# Altium PCB PCB_Alpha.PcbDoc (part 2 of 2)
Units mm, origin at the board's own origin, x right, y up, seen from the top; angles counter-clockwise.
Board outline 114.3 x 137.16 mm, 2 copper layers (Top Layer, Bottom Layer); 181 components, 118 nets, 600 pads, 750 vias.
Unrouted connection lines stored in the file: 4.
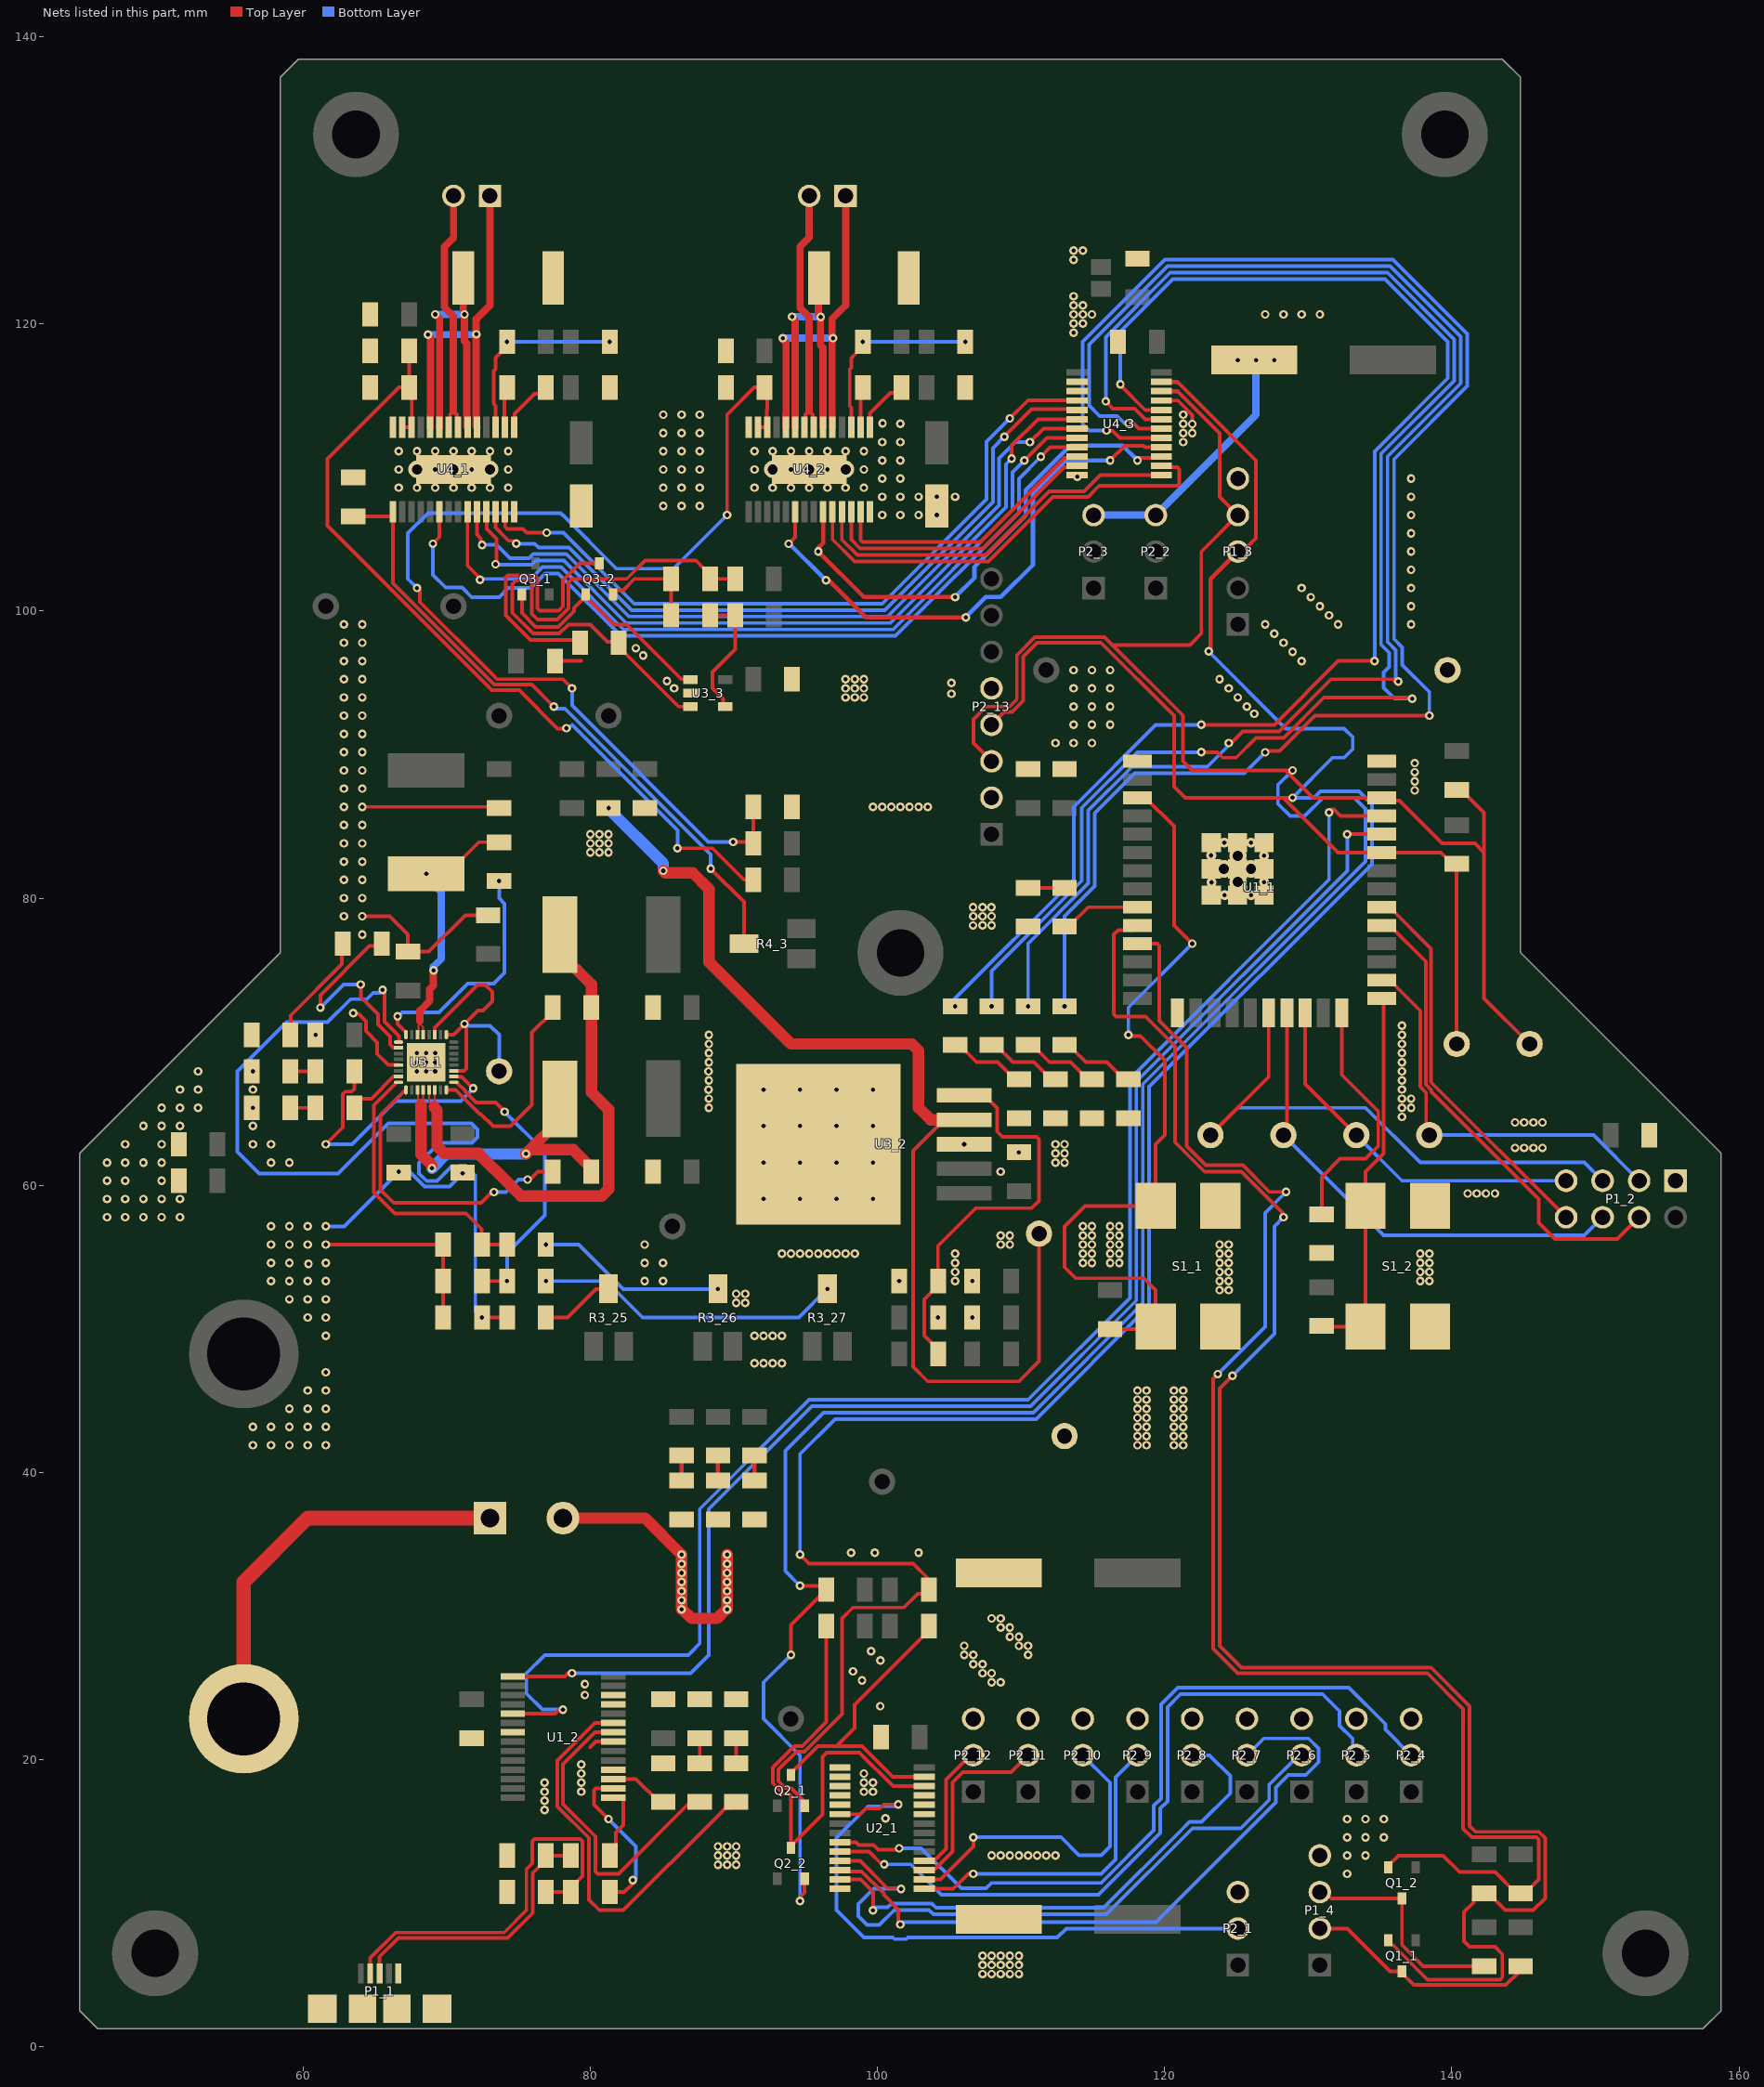
[diagram p2: the nets of this part, all layers, seen from the top]

## Via types
v1: diameter 0.6, hole 0.3, Top Layer to Bottom Layer, 732 vias
v2: diameter 1.2, hole 0.7, Top Layer to Bottom Layer, 10 vias
v3: diameter 0.7, hole 0.3, Top Layer to Bottom Layer, 8 vias

## Nets (pads, with @x,y where several pads share a name; then routed paths per layer and width w, separated by ;. In a path a pad name is that pad's centre, name@x,y a point inside that pad or via, vN(x,y) a via of type N, cw(c..) or ccw(c..) an arc to the next point about the centre after c; other vN are vias at no path point) (continued)
GND: C1_1.2 C1_2.2 C1_3.2 C1_4.2 C1_5.2 C1_6.1 C1_7.2 C1_8.2 C2_1.2 C2_2.2 C2_3.2 C2_4.2 C3_1.1 C3_2.1 C3_3.1 C3_10.1 C3_11.1 C3_12.1 C3_13.1 C3_14.1 C3_15.1 C3_16.1 C3_17.1 C3_18.1 C3_19.1 C4_5.2 C4_7.2 C4_8.2 C4_9.2 C4_10.2 C4_11.2 C4_12.2 C4_13.2 C4_14.2 C4_15.2 D3_1.1 D3_3.1 P1_1.5 P1_1.6 P1_2.1 P1_3.5 P1_4.4 P2_1.3 P2_2.3 P2_3.3 P2_4.3 P2_5.3 P2_6.3 P2_7.3 P2_8.3 P2_9.3 P2_10.3 P2_11.3 P2_12.3 P2_13.2 P2_13.5 P3_1.2 Q3_2.2 R1_1.2 R1_6.2 R1_7.2 R1_14.2 R3_1.2 R3_2.2 R3_3.1 R3_7.1 R3_8.1 R3_9.2 R3_11.1 R3_14.1 R3_18.1 R3_20.2 R3_21.2 R3_22.2 R3_23.2 R3_24.2 R4_2.2 R4_6.2 R4_7.2 R4_8.2 R4_9.2 R4_10.2 R4_11.2 R4_13.2 R4_15.2 S1_1.1 S1_2.2 T3_7.1 T3_8.1 T3_9.1 U1_1.1 U1_1.15 U1_1.38 U1_1.39 U1_1.40 U1_1.41 U1_1.42 U1_1.43 U1_1.44 U1_1.45 U1_1.46 U1_1.47 U1_2.7 U1_2.18 U1_2.21 U1_2.25 U1_2.26 U2_1.1 U2_1.2 U2_1.3 U2_1.4 U2_1.5 U2_1.14 U2_1.23 U2_1.24 U2_1.25 U3_1.5 U3_1.19 U3_1.25 U3_1.27 U3_1.33 U3_2.3 U3_3.2 U4_1.14 U4_1.28 U4_2.14 U4_2.28 U4_3.2 U4_3.3 U4_3.12 U4_3.21 | length 127.1
  Top Layer w0.254: v1(61.595,55.88) R3_7.1@69.77,55.88 R3_8.1@69.77,53.34 R3_9.2@69.77,50.8 ; v1(63.5,72.009) 63.566,71.943 63.881,71.943 64.263,71.561 64.384,71.44 64.384,70.749 65.174,69.959 65.174,69.157 65.949,68.382 66.653,68.382 U3_1.5@66.655,68.38 ; v1(64.135,78.74) 66.04,78.74 67.31,77.47 C3_10.1@67.31,76.28 68.762,76.28 71.302,78.82 C3_11.1@72.898,78.82 ; v1(64.135,86.36) 73.58,86.36 C3_3.1@73.66,86.28 ; U3_1.33@69.137,68.023 v1(68.58,68.58) U3_1.33@69.18,69.18 ; U3_1.27@69.18,70.505 69.182,70.507 69.182,70.993 72.159,73.969 72.716,73.969 73.195,73.49 73.195,72.828 72.547,72.18 72.18,72.18 v1(71.247,71.247) ; U3_1.25@70.033,70.505 70.505,70.505 v1(71.247,71.247) ; U3_1.19@70.505,67.98 70.507,67.982 71.225,67.982 71.374,68.131 71.374,71.026 71.247,71.153 v1(71.247,71.247) ; R3_18.1@77.55,96.52 79.375,96.52 ; 80.01,20.879 80.396,21.265 U1_2.21@81.605,21.265 ; Q3_2.2@81.595,101.16 81.595,101.285 81.768,101.458 82.312,101.458 83.089,102.235 R3_14.1@85.645,102.235 D3_1.1@85.645,99.695 ; U4_3.12@113.449,109.357 113.547,109.455 U4_3.12@113.722,109.455 ; U4_3.12@113.902,109.378 113.919,109.361 v1(113.919,109.347) ; U4_3.21@119.778,114.655 120.91,114.655 121.92,113.645 v1(121.92,112.395)
  Top Layer w0.508: R3_24.2@86.32,36.79 R3_24.2@86.36,36.75
  Top Layer w0.762: R3_23.2@91.4,36.79 R3_23.2@91.44,36.75
  Top Layer w0.8: P3_1.2@78.105,36.83 83.82,36.83 v1(86.36,34.29) v1(86.36,32.385) v1(86.36,30.48) 86.425,30.48 87.06,29.845 88.835,29.845 89.47,30.48 v1(89.535,30.48) v1(89.535,32.385) v1(89.535,34.29)
  Bottom Layer w0.254: v1(61.595,57.15) 62.865,57.15 v1(66.675,60.96) 67.419,60.96 68.455,59.924 70.211,59.924 v1(71.12,60.833) ; v1(71.247,71.247) 71.374,71.12 73.025,71.12 73.66,70.485 T3_8.1@73.66,67.945
  Bottom Layer w0.508: T3_8.1@73.646,67.296 T3_8.1@73.646,67.303 ; P2_3.3@115.062,106.68 P2_2.3@119.38,106.68 126.365,113.665 v1(126.365,117.475)
  other v1: 107.315,5.08 107.95,5.08 108.585,5.08 109.22,5.08 109.855,5.08 107.315,5.715 107.95,5.715 108.585,5.715 109.22,5.715 109.855,5.715 107.315,6.35 107.95,6.35 108.585,6.35 109.22,6.35 109.855,6.35 132.715,12.065 88.9,12.7 89.535,12.7 90.17,12.7 88.9,13.335 89.535,13.335 90.17,13.335 107.95,13.335 108.585,13.335 109.22,13.335 109.855,13.335 110.49,13.335 111.125,13.335 111.76,13.335 112.395,13.335 132.715,13.335 133.985,13.335 88.9,13.97 89.535,13.97 90.17,13.97 132.715,14.605 133.985,14.605 135.255,14.605 132.715,15.875 133.985,15.875 135.255,15.875 100.559,15.926 76.835,16.51 76.835,17.145 76.835,17.78 79.375,17.78 99.06,17.78 99.695,17.78 76.835,18.415 79.375,18.415 99.06,18.415 99.695,18.415 79.375,19.05 99.06,19.05 79.375,19.685 100.197,23.733 79.629,24.511 79.629,25.273 107.95,25.4 108.585,25.4 98.933,25.527 107.315,26.035 107.95,26.035 98.298,26.162 106.68,26.67 107.315,26.67 100.203,26.924 106.045,27.305 106.68,27.305 110.49,27.305 99.568,27.559 106.045,27.94 109.855,27.94 110.49,27.94 109.22,28.575 109.855,28.575 108.585,29.21 109.22,29.21 107.95,29.845 108.585,29.845 86.36,31.115 89.535,31.115 86.36,31.75 89.535,31.75 86.36,33.02 89.535,33.02 86.36,33.655 89.535,33.655 98.171,34.417 99.822,34.417 102.87,34.417 56.515,41.91 57.785,41.91 59.055,41.91 60.325,41.91 61.595,41.91 118.11,41.91 118.745,41.91 120.65,41.91 121.285,41.91 118.11,42.545 118.745,42.545 120.65,42.545 121.285,42.545 56.515,43.18 57.785,43.18 59.055,43.18 60.325,43.18 61.595,43.18 118.11,43.18 118.745,43.18 120.65,43.18 121.285,43.18 118.11,43.815 118.745,43.815 120.65,43.815 121.285,43.815 59.055,44.45 60.325,44.45 61.595,44.45 118.11,44.45 118.745,44.45 120.65,44.45 121.285,44.45 118.11,45.085 118.745,45.085 120.65,45.085 121.285,45.085 60.325,45.72 61.595,45.72 118.11,45.72 118.745,45.72 120.65,45.72 121.285,45.72 61.595,46.99 91.44,47.625 92.075,47.625 92.71,47.625 93.345,47.625 61.595,49.53 91.44,49.53 92.075,49.53 92.71,49.53 93.345,49.53 60.325,50.8 61.595,50.8 104.22,50.8 106.6,50.8 90.17,51.816 90.805,51.816 59.055,52.07 60.325,52.07 61.595,52.07 90.17,52.451 90.805,52.451 123.825,52.705 124.46,52.705 57.785,53.34 59.055,53.34 60.325,53.34 61.595,53.34 83.8,53.338 85.07,53.338 101.52,53.34 105.41,53.34 106.6,53.34 123.825,53.34 124.46,53.34 137.795,53.34 138.43,53.34 105.41,53.975 123.825,53.975 124.46,53.975 137.795,53.975 138.43,53.975 60.388,54.541 57.785,54.61 59.055,54.61 61.595,54.61 83.8,54.608 85.07,54.608 105.41,54.61 114.3,54.61 114.935,54.61 116.205,54.61 116.84,54.61 123.825,54.61 124.46,54.61 137.795,54.61 138.43,54.61 93.345,55.245 93.98,55.245 94.615,55.245 95.25,55.245 95.885,55.245 96.52,55.245 97.155,55.245 97.79,55.245 98.425,55.245 105.41,55.245 114.3,55.245 114.935,55.245 116.205,55.245 116.84,55.245 123.825,55.245 124.46,55.245 137.795,55.245 138.43,55.245 57.785,55.88 59.055,55.88 60.325,55.88 83.8,55.878 108.585,55.88 109.22,55.88 114.3,55.88 114.935,55.88 116.205,55.88 116.84,55.88 123.825,55.88 124.46,55.88 108.585,56.515 109.22,56.515 114.3,56.515 114.935,56.515 116.205,56.515 116.84,56.515 57.785,57.15 59.055,57.15 60.325,57.15 114.3,57.15 114.935,57.15 116.205,57.15 116.84,57.15 46.355,57.785 47.625,57.785 48.895,57.785 50.165,57.785 51.435,57.785 46.355,59.055 47.625,59.055 48.895,59.055 50.165,59.055 51.435,59.055 92.075,59.055 94.615,59.055 97.155,59.055 99.695,59.055 141.097,59.436 141.732,59.436 142.367,59.436 143.002,59.436 46.355,60.325 47.625,60.325 50.165,60.325 108.585,60.96 46.355,61.595 47.625,61.595 48.895,61.595 50.165,61.595 57.785,61.595 59.055,61.595 92.075,61.595 94.615,61.595 97.155,61.595 99.695,61.595 112.395,61.595 113.03,61.595 112.395,62.23 113.03,62.23 109.855,62.31 144.399,62.611 145.034,62.611 145.669,62.611 146.304,62.611 47.625,62.865 50.165,62.865 56.515,62.865 57.785,62.865 106.045,62.865 112.395,62.865 113.03,62.865 48.895,64.135 50.165,64.135 51.435,64.135 56.515,64.135 92.075,64.135 94.615,64.135 97.155,64.135 99.695,64.135 144.399,64.389 145.034,64.389 145.669,64.389 146.304,64.389 136.525,64.77 50.165,65.405 51.435,65.405 52.705,65.405 56.515,65.405 88.265,65.405 136.525,65.405 137.16,65.405 88.265,66.04 136.525,66.04 137.16,66.04 51.435,66.675 52.705,66.675 56.515,66.675 88.245,66.673 92.075,66.675 94.615,66.675 97.155,66.675 99.695,66.675 136.525,66.675 88.265,67.31 136.525,67.31 52.705,67.945 56.515,67.945 67.945,67.945 68.58,67.945 69.215,67.945 88.245,67.943 136.525,67.945 67.945,68.58 69.215,68.58 88.265,68.58 136.525,68.58 67.945,69.215 68.58,69.215 69.215,69.215 88.265,69.215 136.525,69.215 88.265,69.85 136.525,69.85 60.88,70.485 88.265,70.485 136.525,70.485 136.525,71.12 64.135,77.47 106.66,78.103 107.315,78.105 107.95,78.105 62.865,78.74 106.68,78.74 107.315,78.74 107.95,78.74 106.66,79.373 107.315,79.375 107.93,79.373 62.865,80.01 64.135,80.01 62.865,81.28 64.135,81.28 62.865,82.55 64.135,82.55 80.01,83.185 80.645,83.185 81.28,83.185 62.865,83.82 64.135,83.82 80.01,83.82 80.645,83.82 81.28,83.82 80.01,84.455 80.645,84.455 81.28,84.455 62.865,85.09 64.135,85.09 62.865,86.36 99.695,86.36 100.33,86.36 100.965,86.36 101.6,86.36 102.235,86.36 102.87,86.36 103.505,86.36 137.414,87.503 62.865,87.63 64.135,87.63 137.414,88.138 137.414,88.773 62.865,88.9 64.135,88.9 137.414,89.408 62.865,90.17 64.135,90.17 112.395,90.805 113.665,90.805 114.935,90.805 62.865,91.44 64.135,91.44 113.665,92.075 114.935,92.075 116.205,92.075 62.865,92.71 64.135,92.71 126.236,92.839 113.665,93.345 114.935,93.345 116.205,93.345 125.73,93.345 62.865,93.98 64.135,93.98 97.79,93.98 98.425,93.98 99.06,93.98 125.095,93.98 105.156,94.234 85.852,94.615 97.79,94.615 98.425,94.615 99.06,94.615 113.665,94.615 114.935,94.615 116.205,94.615 124.46,94.615 105.156,94.996 85.344,95.123 62.865,95.25 64.135,95.25 97.79,95.25 98.425,95.25 99.06,95.25 123.825,95.25 113.665,95.885 114.935,95.885 116.205,95.885 62.865,96.52 64.135,96.52 129.54,96.52 83.693,96.901 128.905,97.155 83.185,97.409 62.865,97.79 64.135,97.79 128.27,97.79 127.635,98.425 62.865,99.06 64.135,99.06 127,99.06 132.08,99.06 137.16,99.06 131.445,99.695 130.81,100.33 137.16,100.33 130.175,100.965 129.54,101.6 137.16,101.6 137.16,102.87 137.16,104.14 137.16,105.41 100.33,106.68 101.6,106.68 102.87,106.68 104.14,106.68 137.16,106.68 85.09,107.315 86.36,107.315 87.63,107.315 100.33,107.95 101.6,107.95 102.87,107.95 104.14,107.95 105.41,107.95 137.16,107.95 66.675,108.585 67.945,108.585 69.215,108.585 70.485,108.585 71.755,108.585 73.025,108.585 74.295,108.585 85.09,108.585 86.36,108.585 87.63,108.585 91.44,108.585 92.71,108.585 93.98,108.585 95.25,108.585 96.52,108.585 97.79,108.585 99.06,108.585 100.33,109.22 101.6,109.22 137.16,109.22 66.675,109.855 69.215,109.855 71.755,109.855 74.295,109.855 85.09,109.855 86.36,109.855 87.63,109.855 91.44,109.855 93.98,109.855 96.52,109.855 99.06,109.855 100.33,110.49 101.6,110.49 66.675,111.125 67.945,111.125 69.215,111.125 70.485,111.125 71.755,111.125 73.025,111.125 74.295,111.125 85.09,111.125 86.36,111.125 87.63,111.125 91.44,111.125 92.71,111.125 93.98,111.125 95.25,111.125 96.52,111.125 97.79,111.125 99.06,111.125 100.33,111.76 101.6,111.76 121.285,111.76 85.09,112.395 86.36,112.395 87.63,112.395 121.285,112.395 101.6,113.03 121.285,113.03 121.92,113.02 100.358,113.069 85.09,113.665 86.36,113.665 87.63,113.665 121.285,113.665 125.095,117.475 127.635,117.475 113.665,119.38 113.665,120.015 114.3,120.015 113.665,120.65 114.3,120.65 114.935,120.65 127,120.65 128.27,120.65 129.54,120.65 130.81,120.65 113.665,121.285 114.3,121.285 113.665,121.92 113.665,124.46 113.665,125.095 114.3,125.095
  other v2: 125.095,81.128 124.13,82.042 126.009,82.042 125.095,82.956 67.945,109.855 70.485,109.855 73.025,109.855 92.71,109.855 95.25,109.855 97.79,109.855
  other v3: 124.181,80.213 126.009,80.213 123.266,81.102 126.924,81.128 126.924,82.956 123.241,82.982 124.155,83.871 126.009,83.871
LedProgRx: D1_1.2 U1_2.22 | length 22.2
  Top Layer w0.254: U1_2.22@81.605,21.915 80.335,21.915 78.105,19.685 78.105,16.924 80.366,14.664 80.366,12.214 80.514,12.065 81.981,12.065 86.981,17.065 D1_1.2@87.63,17.065
LedProgTx: D1_2.2 U1_2.23 | length 29.2
  Top Layer w0.254: U1_2.23@81.605,22.565 80.347,22.565 77.724,19.942 77.724,16.757 79.915,14.566 79.915,10.255 80.645,9.525 82.315,9.525 88.9,16.11 89.432,16.642 89.747,16.642 D1_2.2@90.17,17.065
NetC1_1_1: C1_1.1 U1_2.17 | length 4.1
  Top Layer w0.254: U1_2.17@81.605,18.665 83.19,18.665 84.79,17.065 C1_1.1@85.09,17.065
NetC1_6_2: C1_6.2 P1_1.2 R1_10.2 | length 27.4
  Top Layer w0.254: P1_1.2@64.692,5.117 64.692,6.194 66.469,7.971 74.011,7.971 75.565,9.525 75.565,12.382 75.971,12.787 75.971,14.329 76.12,14.478 79.315,14.478 79.464,14.329 79.464,11.899 78.448,10.883 78.448,10.795 C1_6.2@76.915,10.795
NetC1_7_1: C1_7.1 P1_1.3 R1_11.2 | length 19.2
  Top Layer w0.254: P1_1.3@65.342,5.117 65.342,6.287 66.645,7.59 73.633,7.59 74.268,7.59 76.016,9.338 76.016,9.973 76.016,12.136 76.915,13.035 C1_7.1@76.915,13.335 R1_11.2@78.66,13.335
NetC3_4_1: C3_4.1 U3_1.7 | length 4.1
  Top Layer w0.254: C3_4.1@63.58,65.405 63.58,65.617 64.003,66.04 64.768,66.04 66.306,67.578 66.653,67.578 U3_1.7@66.655,67.58
NetC3_4_2: C3_4.2 R3_1.1 | length 1.7
  Top Layer w0.254: R3_1.1@59.135,65.405 C3_4.2@60.88,65.405
NetC3_5_1: C3_5.1 U3_1.18 | length 19.4
  Top Layer w0.254: v1(61.595,62.865) 62.776,64.046 62.776,64.904 62.776,66.36 62.953,66.537 63.403,66.537 63.58,66.714 C3_5.1@63.58,67.945 ; 70.843,67.559 71.05,67.559 v1(71.856,66.754)
  Bottom Layer w0.254: v1(61.595,62.865) 63.417,62.865 66.433,65.881 70.983,65.881 71.755,66.653 v1(71.856,66.754)
NetC3_5_2: C3_5.2 R3_2.1 | length 1.7
  Top Layer w0.254: R3_2.1@59.135,67.945 C3_5.2@60.88,67.945
NetC3_6_1: C3_6.1 R3_3.2 | length 8
  Top Layer w0.254: R3_3.2@59.135,70.485 59.141,70.491 59.141,71.841 62.717,75.417 62.717,76.869 C3_6.1@62.843,76.995
NetC3_6_2: C3_6.2 U3_1.2 | length 15.8
  Top Layer w0.254: v1(61.217,72.378) 61.217,73.253 64.625,76.661 65.311,76.661 C3_6.2@65.485,76.835 ; v1(64.027,73.988) 64.039,73.976 64.039,73.121 65.232,71.928 65.232,71.202 66.076,70.358 66.076,69.812 66.306,69.582 66.457,69.582 66.459,69.58 U3_1.2@66.655,69.58
  Bottom Layer w0.254: v1(61.217,72.378) 62.827,73.988 v1(64.027,73.988)
NetC3_7_1: C3_7.1 U3_1.9 | length 21
  Top Layer w0.254: U3_1.9@67.18,66.655 67.18,66.668 67.178,66.67 65.405,64.897 65.405,59.69 66.318,58.777 72.402,58.777 73.162,59.537 v1(73.303,59.537) ; v1(75.648,60.408) 75.815,60.408 76.367,60.96 C3_7.1@77.39,60.96
  Bottom Layer w0.254: v1(73.303,59.537) 74.142,59.537 75.013,60.408 v1(75.648,60.408)
NetC3_7_2: C3_7.2 L3_1.1 U3_1.11 U3_1.12 | length 23.9
  Top Layer w0.127: U3_1.11@67.98,66.655 68.024,66.611 68.024,65.961 68.199,65.786 68.38,65.967 U3_1.12@68.38,66.655
  Top Layer w0.254: C3_7.2@79.899,61.151 C3_7.2@80.09,60.96
  Top Layer w0.508: 68.215,65.786 68.221,65.78 ; v1(68.981,61.194) v1@68.981,61.4 ; v1(75.533,62.198) 75.565,62.23 v1@75.565,62.238 ; L3_1.1@77.893,64.566 L3_1.1@77.893,66.026
  Top Layer w0.8: 68.229,65.61 68.217,65.598 68.217,65.311 68.221,65.306 68.221,62.16 68.58,61.801 v1@68.981,61.4 ; v1(75.533,62.198) 75.819,62.484 78.82,62.484 79.894,61.41 79.94,61.41 C3_7.2@79.94,61.151 ; v1@75.565,62.238 L3_1.1@77.893,64.566
  Bottom Layer w0.8: v1(68.981,61.194) 69.97,62.183 75.518,62.183 v1(75.533,62.198)
NetC3_8_1: C3_8.1 U3_1.16 | length 15
  Top Layer w0.254: U3_1.16@69.98,66.655 70.632,66.655 72.317,64.97 72.39,64.97 73.246,64.114 74.459,64.114 75.946,65.601 75.946,70.646 77.39,72.09 C3_8.1@77.39,72.39
NetC3_8_2: C3_8.2 L3_2.1 U3_1.13 U3_1.14 | length 37.7
  Top Layer w0.127: U3_1.13@68.78,66.655 68.78,65.84 68.908,65.712 69.014,65.712 69.18,65.878 U3_1.14@69.18,66.655
  Top Layer w0.508: 74.446,59.994 74.446,60.011 ; L3_2.1@77.893,77.456 77.893,75.996 78.845,75.043 L3_2.1@79.049,75.043
  Top Layer w0.8: 69.144,65.461 69.144,65.435 69.342,65.237 69.342,62.738 69.85,62.23 72.227,62.23 74.446,60.011 ; 74.446,59.994 75.175,59.265 80.811,59.265 81.28,59.734 81.28,65.297 80.09,66.487 C3_8.2@80.09,72.39 80.09,74.002 L3_2.1@79.049,75.043
NetC3_9_1: C3_9.1 L3_3.2 U3_1.29 U3_1.30 | length 19.1
  Top Layer w0.127: U3_1.30@67.98,70.505 68.042,70.567 68.042,71.115 68.12,71.194 68.12,71.235 ; 68.166,71.281 68.166,71.232 68.38,71.018 U3_1.29@68.38,70.505
  Top Layer w0.254: 68.153,71.268 68.153,71.455 ; v1(68.594,81.703) 70.054,81.703 72.252,83.9 C3_9.1@73.66,83.9
  Top Layer w0.508: 68.153,71.455 68.153,72.172 68.834,72.852 68.834,73.66 69.093,73.919 v1(69.093,74.974)
  Bottom Layer w0.508: v1(68.594,81.703) 68.594,81.472 69.639,80.427 69.639,75.783 69.093,75.237 v1(69.093,74.974)
NetC3_9_2: C3_9.2 U3_1.32 | length 16.6
  Top Layer w0.254: v1(66.594,71.783) 66.599,71.778 66.599,71.247 67.143,70.703 U3_1.32@67.178,70.703
  Bottom Layer w0.254: v1(66.594,71.783) 66.654,71.783 66.916,72.045 69.479,72.045 71.476,74.041 73.279,74.041 74.041,74.803 74.041,79.629 73.66,80.01 v1(73.66,81.2)
NetC4_1_1: C4_1.1 U4_1.1 | length 3.9
  Top Layer w0.254: U4_1.1@74.71,112.793 74.754,112.837 74.754,113.743 76.133,115.122 76.492,115.122 76.915,115.545 C4_1.1@76.915,115.57
NetC4_1_2: C4_1.2 U4_1.2 | length 2.9
  Top Layer w0.254: U4_1.2@74.06,112.793 74.04,112.813 74.04,115.395 C4_1.2@74.215,115.57
NetC4_2_1: C4_2.1 U4_2.1 | length 3.9
  Top Layer w0.254: U4_2.1@99.475,112.793 99.475,113.775 100.898,115.198 101.308,115.198 C4_2.1@101.68,115.57
NetC4_2_2: C4_2.2 U4_2.2 | length 2.8
  Top Layer w0.254: U4_2.2@98.825,112.793 98.824,115.414 C4_2.2@98.98,115.57
NetC4_3_2: C4_3.2 R4_4.1 U4_1.3 | length 13.5
  Top Layer w0.254: U4_1.3@73.41,112.793 73.41,114.296 73.279,114.427 73.279,116.713 73.406,116.84 73.406,117.636 74.215,118.445 v1(74.215,118.745)
  Bottom Layer w0.254: v1(74.215,118.745) v1(81.36,118.745)
NetC4_4_2: C4_4.2 R4_5.1 U4_2.3 | length 13.5
  Top Layer w0.254: U4_2.3@98.175,112.793 98.175,114.169 98.075,114.269 98.075,116.84 98.175,116.94 98.175,117.606 98.557,117.988 98.557,118.322 v1(98.98,118.745)
  Bottom Layer w0.254: v1(98.98,118.745) v1(106.125,118.745)
NetC4_5_1: C4_5.1 R4_3.3 U4_1.15 | length 44.9
  Top Layer w0.254: C4_5.1@63.5,106.6 66.162,106.6 U4_1.15@66.26,106.698 ; U4_1.15@66.26,106.917 U4_1.15@66.26,106.698 ; v1(77.47,93.345) 75.946,94.869 73.32,94.869 66.26,101.929 66.26,106.6 U4_1.15@66.26,106.698 ; v1(88.393,82.054) 90.71,79.738 R4_3.3@90.71,76.835
  Bottom Layer w0.254: v1(77.47,93.345) 77.617,93.198 78.252,93.198 88.393,83.057 v1(88.393,82.054)
NetC4_14_1: C4_14.1 R4_1.1 R4_2.1 U4_1.12 U4_1.13 | length 59.3
  Top Layer w0.254: U4_1.13@66.91,112.793 U4_1.12@67.56,112.793 67.579,112.812 67.579,115.381 C4_14.1@67.39,115.57 ; R4_2.1@67.39,118.11 C4_14.1@67.39,115.57 ; v1(78.349,91.844) 78.326,91.821 77.724,91.821 75.057,94.488 73.152,94.488 61.7,105.94 61.7,110.595 66.675,115.57 C4_14.1@67.39,115.57 ; v1(86.082,83.483) 88.516,83.483 90.719,81.28 R4_1.1@91.36,81.28
  Bottom Layer w0.254: v1(78.349,91.844) 78.359,91.854 78.519,91.854 78.74,92.075 86.082,84.733 v1(86.082,83.483)
NetC4_15_1: C4_15.1 R4_14.1 R4_15.1 U4_2.12 U4_2.13 | length 78.4
  Top Layer w0.254: v1(67.945,101.6) 68.139,101.406 68.139,100.623 73.115,95.647 73.512,95.25 78.105,95.25 v1(78.74,94.615) ; v1(89.535,106.68) 89.535,113.665 91.44,115.57 C4_15.1@92.155,115.57 92.325,115.4 92.325,114.05 92.311,114.036 92.311,112.807 U4_2.12@92.325,112.793 U4_2.13@91.675,112.793 ; v1(89.961,83.919) 91.261,83.919 R4_14.1@91.36,83.82 R4_15.1@91.36,86.36
  Bottom Layer w0.254: v1(67.945,101.6) 67.31,102.235 67.31,105.41 68.717,106.817 77.946,106.817 78.083,106.68 78.105,106.68 81.836,102.949 85.804,102.949 v1(89.535,106.68) ; v1(78.74,94.615) 78.74,93.418 88.239,83.919 v1(89.961,83.919)
NetD1_1_1: D1_1.1 R1_6.1 | length 1.7
  Top Layer w0.254: D1_1.1@87.63,19.765 R1_6.1@87.63,21.51
NetD1_2_1: D1_2.1 R1_7.1 | length 1.7
  Top Layer w0.254: D1_2.1@90.17,19.765 R1_7.1@90.17,21.51
NetD1_3_1: D1_3.1 U1_1.9 | length 5.6
  Top Layer w0.254: D1_3.1@113.03,78.025 113.33,78.025 114.68,79.375 U1_1.9@118.11,79.375
NetD1_3_2: D1_3.2 R1_1.1 | length 2.5
  Top Layer w0.254: R1_1.1@110.49,80.725 D1_3.2@113.03,80.725
NetD3_1_2: D3_1.2 R3_16.1 U3_3.4 | length 9.1
  Top Layer w0.254: D3_1.2@88.345,99.695 R3_16.1@90.09,99.695 90.09,97.329 88.519,95.758 88.519,94.615 89.257,93.877 89.257,93.483 U3_3.4@89.395,93.345
NetD3_5_1: D3_5.1 T3_3.1 U3_2.4 | length 74.7
  Top Layer w0.254: U3_2.4@104.648,64.567 102.489,62.408 102.489,47.371 103.505,46.355 109.852,46.355 111.252,47.755 T3_3.1@111.252,56.642
  Top Layer w0.8: v1(85.09,81.915) 85.237,81.768 87.142,81.768 88.265,80.645 88.265,75.565 93.98,69.85 102.401,69.85 102.87,69.381 102.87,65.405 103.708,64.567 U3_2.4@104.648,64.567
  Bottom Layer w0.8: v1(81.28,86.28) 81.28,86.229 85.09,82.419 v1(85.09,81.915)
NetD3_6_2: D3_6.2 R3_22.1 | length 1.7
  Top Layer w0.3: R3_22.1@88.9,39.45 D3_6.2@88.9,41.195
NetD3_7_2: D3_7.2 R3_23.1 | length 1.7
  Top Layer w0.3: R3_23.1@91.44,39.45 D3_7.2@91.44,41.195
NetD3_8_2: D3_8.2 R3_24.1 | length 1.7
  Top Layer w0.3: R3_24.1@86.36,39.45 D3_8.2@86.36,41.195
NetD4_1_1: D4_1.1 U4_3.20 | length 100.2
  Top Layer w0.254: v1(116.917,115.779) 116.917,115.729 118.641,114.005 U4_3.20@119.778,114.005 ; v1(122.555,92.075) 122.557,92.077 127.637,92.077 132.08,96.52 v1(134.62,96.52)
  Bottom Layer w0.254: v1(105.41,72.47) 105.41,73.028 113.665,81.283 113.665,86.36 119.38,92.075 v1(122.555,92.075) ; v1(116.917,115.779) 116.917,119.449 120.575,123.107 135.335,123.107 139.062,119.38 139.7,118.742 139.7,116.208 134.62,111.128 v1(134.62,96.52)
NetD4_1_2: D4_1.2 R4_8.1 | length 5.4
  Top Layer w0.254: D4_1.2@105.41,69.77 105.71,69.77 106.9,68.58 108.365,68.58 109.555,67.39 R4_8.1@109.855,67.39
NetD4_2_1: D4_2.1 U4_3.19 | length 108.9
  Top Layer w0.254: v1(115.901,114.6) 115.903,114.6 116.405,114.098 116.842,114.098 116.855,114.086 117.065,114.086 117.066,114.087 117.908,114.087 118.33,113.665 118.343,113.665 118.653,113.355 U4_3.19@119.778,113.355 ; v1(122.555,90.17) 123.658,90.17 124.039,89.789 124.979,89.789 126.365,91.175 128.286,91.175 131.091,93.98 137.144,93.98 v1(137.227,93.897)
  Bottom Layer w0.254: v1(107.95,72.47) 107.95,74.93 114.238,81.218 114.238,86.295 118.113,90.17 v1(122.555,90.17) ; v1(115.901,114.6) 115.901,119.071 120.388,123.558 135.522,123.558 140.167,118.913 140.167,116.037 135.071,110.941 135.071,97.669 135.642,97.097 135.642,96.105 135.255,95.718 135.255,94.648 136.006,93.897 v1(137.227,93.897)
NetD4_2_2: D4_2.2 R4_9.1 | length 5.4
  Top Layer w0.254: D4_2.2@107.95,69.77 108.25,69.77 109.44,68.58 110.905,68.58 111.672,67.813 112.095,67.39 R4_9.1@112.395,67.39
NetD4_3_1: D4_3.1 U4_3.18 | length 107.5
  Top Layer w0.254: v1(117.487,113.071) 117.476,113.071 117.475,113.072 117.524,113.121 117.799,113.121 118.215,112.705 U4_3.18@119.778,112.705 ; v1(124.46,90.805) 124.627,90.805 125.448,91.626 127.976,91.626 131.6,95.25 135.89,95.25 136.057,95.083 v1(136.271,95.083)
  Bottom Layer w0.254: v1(110.49,72.47) 110.49,76.832 114.688,81.031 114.688,86.108 117.734,89.154 122.976,89.154 124.46,90.638 v1(124.46,90.805) ; v1(117.487,113.071) 117.212,113.071 116.699,113.584 115.47,113.584 114.751,114.303 114.751,118.558 120.202,124.009 135.708,124.009 140.618,119.1 140.618,115.85 135.522,110.754 135.522,97.856 136.093,97.284 136.093,95.261 v1(136.271,95.083)
NetD4_3_2: D4_3.2 R4_10.1 | length 5.4
  Top Layer w0.254: D4_3.2@110.49,69.77 110.79,69.77 111.98,68.58 113.445,68.58 114.635,67.39 R4_10.1@114.935,67.39
NetD4_4_1: D4_4.1 U4_3.17 | length 113
  Top Layer w0.254: v1(115.963,112.568) 116.18,112.568 116.205,112.543 116.379,112.543 116.867,112.055 U4_3.17@119.778,112.055 ; v1(127,90.159) 127.109,90.268 128.016,90.268 130.458,92.71 v1(138.43,92.71)
  Bottom Layer w0.254: v1(113.03,72.47) 113.03,78.735 115.139,80.844 115.139,85.922 117.921,88.703 125.533,88.703 126.989,90.159 v1(127,90.159) ; v1(115.963,112.568) 114.762,112.568 114.3,113.03 114.3,118.745 120.015,124.46 135.895,124.46 141.069,119.286 141.069,115.664 135.973,110.567 135.973,98.042 136.544,97.471 136.544,96.247 138.43,94.361 v1(138.43,92.71)
NetD4_4_2: D4_4.2 R4_11.1 | length 5.4
  Top Layer w0.254: D4_4.2@113.03,69.77 113.33,69.77 113.753,69.347 114.52,68.58 115.985,68.58 117.175,67.39 R4_11.1@117.475,67.39
NetP1_4_2: P1_4.2 Q1_1.1 R1_4.2 | length 15.9
  Top Layer w0.254: P1_4.2@130.81,8.255 132.715,8.255 135.695,5.275 Q1_1.1@136.525,5.275 136.525,5.15 137.357,4.318 143.764,4.318 R1_4.2@144.653,5.207
NetP1_4_3: P1_4.3 Q1_2.1 R1_5.1 | length 15.5
  Top Layer w0.254: P1_4.3@130.81,10.795 131.167,10.795 131.607,10.355 Q1_2.1@136.525,10.355 136.525,7.112 138.002,5.635 R1_5.1@142.24,5.635
NetP3_1_1: P3_1.1 S3_1.2 | length 31.2
  Top Layer w1.016: S3_1.2@57.144,24.124 S3_1.2@55.88,22.86 55.88,32.385 60.325,36.83 P3_1.1@73.025,36.83 P3_1.1@72.39,36.195
NetP4_1_2: P4_1.2 U4_1.7 U4_1.8 | length 18
  Top Layer w0.254: U4_1.8@70.16,112.793 70.231,112.864 70.231,113.665 70.472,113.906 ; 70.472,113.919 70.472,113.906 ; U4_1.7@70.81,112.793 70.739,112.864 70.739,113.665 70.498,113.906 70.472,113.906
  Top Layer w0.508: 70.472,113.919 70.472,120.536 69.85,121.158 69.85,125.349 70.485,125.984 P4_1.2@70.485,128.905
NetP4_2_2: P4_2.2 U4_2.7 U4_2.8 | length 18
  Top Layer w0.254: U4_2.8@94.925,112.793 94.996,112.864 94.996,113.665 95.25,113.919 95.504,113.665 95.504,112.864 U4_2.7@95.575,112.793
  Top Layer w0.508: 95.25,113.919 95.25,120.472 94.615,121.107 94.615,125.377 95.25,126.012 P4_2.2@95.25,128.905
NetQ2_1_1: Q2_1.1 R2_3.2 U2_1.27 | length 22.1
  Top Layer w0.254: Q2_1.1@93.98,18.95 93.98,19.075 95.86,20.955 97.155,20.955 ; U2_1.27@103.268,18.815 101.073,18.815 98.933,20.955 97.155,20.955 ; R2_3.2@103.585,29.305 103.585,29.005 98.425,23.845 98.425,22.225 97.155,20.955
NetQ2_2_1: Q2_2.1 R2_4.1 U2_1.26 | length 33.4
  Top Layer w0.254: Q2_2.1@93.98,13.87 93.98,17.495 93.822,17.653 93.441,17.653 92.71,18.384 92.71,19.462 94.203,20.955 94.773,20.955 96.44,22.622 R2_4.1@96.44,29.305 ; Q2_2.1@93.98,13.995 96.185,16.2 96.185,20.204 96.485,20.504 98.746,20.504 101.085,18.165 U2_1.26@103.268,18.165
NetQ3_2_1: Q3_2.1 R3_15.1 | length 19.9
  Top Layer w0.254: R3_15.1@79.295,97.79 79.111,97.974 75.834,97.974 74.119,99.689 74.119,102.34 74.268,102.489 76.123,102.489 76.327,102.285 76.327,100.179 76.476,100.03 77.805,100.03 78.105,100.33 78.105,102.139 79.276,103.31 Q3_2.1@80.645,103.31
NetR1_12_1: R1_12.1 S1_1.2 U1_1.3 | length 56.5
  Top Layer w0.254: R1_12.1@116.205,50.005 119.22,50.005 S1_1.2@119.38,50.165 119.38,52.705 118.549,53.536 113.807,53.536 113.03,54.313 113.03,57.15 114.445,58.565 S1_1.2@119.38,58.565 119.38,62.865 120.015,63.5 120.015,68.706 118.32,70.401 117.559,70.401 v1(117.475,70.485) ; U1_1.3@118.11,86.995 118.66,86.995 120.65,85.005 120.65,78.105 v1(121.92,76.835)
  Bottom Layer w0.254: v1(117.475,70.485) 117.475,72.39 v1(121.92,76.835)
NetR1_13_2: R1_13.2 S1_2.1 U1_1.25 | length 26.5
  Top Layer w0.254: R1_13.2@130.937,50.212 130.984,50.165 S1_2.1@133.985,50.165 S1_2.1@133.985,58.565 133.985,60.96 135.255,62.23 135.255,72.88 U1_1.25@135.11,73.025
NetR1_14_1: R1_14.1 U1_1.24 | length 17.8
  Top Layer w0.254: R1_14.1@130.937,57.992 130.937,60.579 132.207,61.849 133.985,61.849 134.874,62.738 134.874,65.151 132.325,67.7 U1_1.24@132.325,72.025
NetR3_4_1: R3_4.1 R3_7.2 U3_1.8 | length 19.6
  Top Layer w0.254: U3_1.8@66.471,67.105 64.954,65.588 64.954,59.503 66.404,58.053 71.36,58.053 72.451,56.962 72.451,55.899 R3_7.2@72.47,55.88 R3_4.1@74.215,55.88
NetR3_4_2: R3_4.2 R3_26.3 | length 13.3
  Bottom Layer w0.254: v1(76.915,55.88) 79.208,55.88 82.304,52.784 88.884,52.784 v1(88.9,52.8)
NetR3_5_1: R3_5.1 R3_8.2 U3_1.17 | length 20
  Top Layer w0.254: U3_1.17@70.703,67.178 71.302,66.579 71.302,66.524 72.062,65.764 73.428,65.764 74.038,65.154 v1(74.038,65.13) ; R3_8.2@72.47,53.34 v1(74.215,53.34)
  Bottom Layer w0.254: v1(74.038,65.13) 76.835,62.333 76.835,57.928 74.215,55.308 v1(74.215,53.34)
NetR3_5_2: R3_5.2 R3_27.3 | length 21.5
  Bottom Layer w0.254: v1(76.915,53.34) 81.111,53.34 83.651,50.8 94.52,50.8 v1(96.52,52.8)
NetR3_6_1: R3_6.1 R3_25.3 | length 5.2
  Top Layer w0.254: R3_6.1@76.915,50.8 78.436,50.8 80.398,52.762 81.242,52.762 R3_25.3@81.28,52.8
NetR3_6_2: R3_6.2 R3_9.1 U3_1.1 | length 63.9
  Top Layer w0.254: v1(65.551,73.614) 65.683,73.483 65.683,71.389 66.675,70.396 U3_1.1@66.675,70.032 ; v1(72.47,50.8) R3_6.2@74.215,50.8
  Bottom Layer w0.254: v1(65.551,73.614) 65.356,73.42 64.896,73.42 64.448,72.972 63.32,72.972 61.71,71.362 58.859,71.362 55.442,67.945 55.442,62.335 56.944,60.833 62.463,60.833 65.938,64.308 71.745,64.308 72.155,63.898 72.155,63.356 71.772,62.973 69.503,62.973 68.092,61.562 68.092,60.826 68.613,60.305 69.349,60.305 70.385,61.341 70.845,61.341 70.891,61.387 71.349,61.387 71.674,61.062 71.674,61.028 72.009,60.693 72.009,51.261 v1(72.47,50.8)
NetR3_13_1: R3_13.1 R3_14.2 R3_15.2 U3_3.3 | length 39.3
  Top Layer w0.254: U3_3.3@86.995,93.345 86.144,93.345 82.422,97.067 82.418,97.067 81.995,97.49 R3_15.2@81.995,97.79 81.928,97.857 81.213,97.857 80.01,99.06 78.486,99.06 77.851,98.425 76.022,98.425 74.57,99.877 74.57,101.875 74.803,102.108 75.797,102.108 75.946,101.959 75.946,99.806 76.341,99.411 77.725,99.411 78.486,100.172 78.486,101.981 78.74,102.235 82.55,102.235 83.82,103.505 87.367,103.505 87.914,102.958 87.922,102.958 88.345,102.535 R3_14.2@88.345,102.235 R3_13.1@90.09,102.235
NetR3_19_2: R3_19.2 R3_20.1 U3_2.5 | length 28.4
  Top Layer w0.254: R3_19.2@104.22,48.26 104.22,48.56 103.251,49.529 103.251,52.071 104.22,53.04 R3_20.1@104.22,53.34 104.22,55.793 106.847,58.42 110.744,58.42 111.252,58.928 111.252,63.224 111.103,63.373 108.712,63.373 108.331,63.754 108.331,65.38 107.442,66.269 U3_2.5@106.045,66.269
NetR4_6_1: R4_6.1 U4_1.6 U4_1.9 | length 20.5
  Top Layer w0.254: U4_1.6@71.417,112.836 U4_1.6@71.46,112.793
  Top Layer w0.508: v1(69.215,120.65) 69.515,120.35 69.515,112.798 U4_1.9@69.51,112.793 ; R4_6.1@71.17,123.19 71.17,120.727 v1(71.247,120.65) 71.247,118.796 71.417,118.626 U4_1.6@71.417,112.836
  Bottom Layer w0.508: v1(69.215,120.65) v1(71.247,120.65)
NetR4_7_1: R4_7.1 U4_2.6 U4_2.9 | length 20.4
  Top Layer w0.508: v1(94.061,120.488) 94.28,120.27 94.28,112.798 U4_2.9@94.275,112.793 ; R4_7.1@95.935,123.19 95.885,123.14 95.885,120.65 v1@96.037,120.498 ; v1(96.055,120.48) v1@96.037,120.498 ; U4_2.6@96.225,112.793 96.209,112.809 96.209,118.345 96.037,118.516 v1@96.037,120.498
  Bottom Layer w0.508: v1(94.061,120.488) 96.047,120.488 v1(96.055,120.48)
NetU4_1_20: U4_1.20 U4_3.9 | length 59.4
  Top Layer w0.254: v1(69.045,104.683) 69.51,105.148 U4_1.20@69.51,106.917 ; v1(111.379,110.744) 112.04,111.405 U4_3.9@113.902,111.405
  Bottom Layer w0.254: v1(69.045,104.683) 69.045,102.521 69.941,101.625 71.088,101.625 71.748,100.965 73.66,100.965 74.295,101.6 75.869,101.6 76.88,102.611 77.788,102.611 82.136,98.263 101.271,98.263 109.855,106.847 109.855,109.22 v1(111.379,110.744)
NetU4_1_23: U4_1.23 U4_3.8 | length 55.9
  Top Layer w0.254: U4_1.23@71.46,106.917 71.46,103.165 72.333,102.292 v1(72.333,102.178) ; v1(110.236,110.49) 111.801,112.055 U4_3.8@113.902,112.055
  Bottom Layer w0.254: v1(72.333,102.178) 72.39,102.235 75.866,102.235 76.693,103.062 77.975,103.062 82.323,98.714 101.084,98.714 109.404,107.034 109.404,109.658 v1(110.236,110.49)
NetU4_1_24: U4_1.24 U4_3.7 | length 53.5
  Top Layer w0.254: U4_1.24@72.11,106.917 72.11,105.33 72.39,105.05 72.39,104.692 v1(72.476,104.606) ; v1(110.617,111.76) 111.562,112.705 U4_3.7@113.902,112.705
  Bottom Layer w0.254: v1(72.476,104.606) 72.482,104.611 73.492,104.611 74.427,103.677 75.737,103.677 76.023,103.963 78.348,103.963 82.696,99.616 100.711,99.616 108.458,107.363 108.458,110.617 109.601,111.76 v1(110.617,111.76)
NetU4_1_25: U4_1.25 U4_3.6 | length 54.6
  Top Layer w0.254: U4_1.25@72.76,106.917 72.803,106.874 72.803,105.715 73.492,105.026 73.492,103.337 v1(73.411,103.256) ; v1(109.347,110.617) 109.347,111.527 111.175,113.355 U4_3.6@113.902,113.355
  Bottom Layer w0.254: v1(73.411,103.256) 73.441,103.226 75.923,103.226 76.21,103.512 78.162,103.512 82.509,99.165 100.898,99.165 108.953,107.22 108.953,110.223 v1(109.347,110.617)
NetU4_1_26: U4_1.26 U4_3.5 | length 52
  Top Layer w0.254: U4_1.26@73.41,106.917 73.41,105.798 74.322,104.887 74.653,104.887 v1(74.848,104.693) ; v1(108.839,112.141) 110.744,114.046 113.861,114.046 U4_3.5@113.902,114.005
  Bottom Layer w0.254: v1(74.848,104.693) 76.136,104.693 76.414,104.414 78.535,104.414 82.883,100.066 100.524,100.066 108.052,107.594 108.052,111.354 v1(108.839,112.141)
NetU4_1_27: U4_1.27 U4_3.4 | length 51.3
  Top Layer w0.254: U4_1.27@74.06,106.917 74.08,106.897 74.08,105.862 74.229,105.714 75.32,105.714 75.581,105.452 v1(76.97,105.452) ; v1(109.22,113.411) 110.49,114.681 113.876,114.681 U4_3.4@113.902,114.655
  Bottom Layer w0.254: v1(76.97,105.452) 78.134,105.452 83.07,100.517 100.337,100.517 107.601,107.781 107.601,111.792 v1(109.22,113.411)
NetU4_2_20: U4_2.20 U4_3.16 | length 38.4
  Top Layer w0.254: v1(93.824,104.681) 94.275,105.132 U4_2.20@94.275,106.917 ; v1(116.205,110.49) 117.221,111.506 118.531,111.506 118.632,111.405 U4_3.16@119.778,111.405
  Top Layer w0.3: v1(96.42,102.135) 96.62,102.135 99.198,99.557 v1(106.157,99.557)
  Bottom Layer w0.3: v1(93.824,104.681) 93.874,104.681 96.321,102.235 v1(96.42,102.135) ; v1(106.157,99.557) 106.157,99.587 107.535,100.965 108.585,100.965 110.829,103.209 110.829,108.222 113.098,110.49 v1(116.205,110.49)
NetU4_2_23: U4_2.23 U4_3.15 | length 34.5
  Top Layer w0.254: v1(118.11,110.49) 118.277,110.657 119.68,110.657 U4_3.15@119.778,110.755
  Top Layer w0.3: U4_2.23@96.225,106.917 96.225,104.742 95.885,104.402 v1(95.885,104.14) 99.06,100.965 v1(105.41,100.965)
  Bottom Layer w0.3: v1(105.41,100.965) 106.759,102.314 106.759,103.08 110.329,106.651 110.329,108.424 113.434,111.529 115.602,111.529 115.775,111.529 117.071,111.529 v1(118.11,110.49)
NetU4_2_24: U4_2.24 U4_3.14 | length 31.3
  Top Layer w0.254: U4_2.24@96.875,106.917 96.875,104.988 98.414,103.449 107.732,103.449 112.232,107.95 114.68,107.95 115.442,108.712 120.882,108.712 121.031,108.861 121.031,109.858 120.882,110.007 119.876,110.007 U4_3.14@119.778,110.105
NetU4_2_25: U4_2.25 U4_3.13 | length 26.9
  Top Layer w0.254: U4_2.25@97.525,106.917 97.525,104.976 98.6,103.9 107.538,103.9 111.969,108.331 114.394,108.331 115.518,109.455 U4_3.13@119.778,109.455
NetU4_2_26: U4_2.26 U4_3.11 | length 20.3
  Top Layer w0.254: U4_2.26@98.175,106.917 98.175,104.963 98.787,104.351 107.352,104.351 113.01,110.009 113.806,110.009 U4_3.11@113.902,110.105
NetU4_2_27: U4_2.27 U4_3.10 | length 19.6
  Top Layer w0.254: U4_2.27@98.825,106.917 98.825,104.951 98.974,104.802 107.165,104.802 113.02,110.657 113.804,110.657 U4_3.10@113.902,110.755
NrfIrq: P1_2.8 U1_1.30 | length 27.2
  Top Layer w0.254: U1_1.30@135.11,79.375 135.66,79.375 138.557,76.478 138.557,67.183 P1_2.8@147.955,57.785
RxFt232Uart: U1_1.35 U1_2.5 | length 109.9
  Top Layer w0.254: U1_2.5@74.605,23.215 77.55,23.215 77.83,23.495 v1(78.105,23.495) ; v1(131.445,85.979) 131.634,86.168 131.804,86.168 132.247,85.725 U1_1.35@135.11,85.725
  Bottom Layer w0.254: v1(78.105,23.495) 76.668,23.495 75.565,24.598 75.565,26.035 76.835,27.305 86.846,27.305 86.995,27.454 87.63,28.089 87.63,37.465 95.25,45.085 110.493,45.085 117.577,52.169 117.577,67.425 131.445,81.293 v1(131.445,85.979)
Schmitt: Q3_1.3 Q3_2.3 U3_3.1 | length 16.9
  Top Layer w0.254: Q3_1.3@75.25,101.16 75.25,99.852 76.205,98.898 77.785,98.898 78.867,99.98 78.867,100.207 79.695,101.035 81.67,99.06 82.55,99.06 86.36,95.25 86.97,95.25 U3_3.1@86.995,95.225
Scl3v3: P1_3.4 P2_13.3 Q2_2.2 R1_9.2 R2_2.1 T1_2.1 U1_1.36 U4_3.22 | length 217.1
  Top Layer w0.254: v1(93.98,27.305) 93.98,29.385 95.936,31.341 96.017,31.341 96.44,31.764 R2_2.1@96.44,31.845 96.162,32.123 v1(94.615,32.123) ; v1(94.615,10.16) 94.615,10.435 94.93,10.75 Q2_2.2@94.93,11.72 ; P2_13.3@107.95,89.535 106.68,90.805 106.68,92.457 107.568,93.345 109.22,93.345 109.713,93.838 109.713,96.917 110.967,98.171 115.824,98.171 116.364,97.631 ; 120.891,115.289 120.923,115.289 123.825,112.387 123.825,107.95 P1_3.4@125.095,106.68 122.555,104.14 122.555,98.425 121.92,97.79 121.92,97.78 121.771,97.631 116.364,97.631 ; v1(128.905,88.9) 128.437,88.9 ; R1_9.2@140.335,87.55 140.635,87.55 141.058,87.127 142.24,85.945 142.24,83.185 ; T1_2.1@145.415,69.85 142.24,73.025 142.24,83.185 ; 116.364,97.631 121.101,92.894 121.285,92.71 121.285,89.535 121.92,88.9 128.437,88.9 ; 128.437,88.9 130.342,86.995 U1_1.36@135.11,86.995 135.308,86.797 136.342,86.797 139.319,83.82 141.605,83.82 142.24,83.185
  Top Layer w0.3: U4_3.22@119.778,115.305 120.875,115.305 120.891,115.289
  Bottom Layer w0.254: v1(93.98,27.305) 92.075,25.4 92.075,22.86 94.615,20.32 v1(94.615,10.16) ; v1(94.615,32.123) 93.599,33.139 93.599,41.529 96.253,44.183 110.866,44.183 118.478,51.796 118.478,67.051 133.985,82.558 133.985,86.211 133.201,86.995 131.024,86.995 129.754,85.725 128.738,85.725 127.889,86.574 127.889,87.884 v1(128.905,88.9)
Sda3v3: P1_3.3 P2_13.4 Q2_1.2 R1_8.2 R2_1.2 T1_1.1 U1_1.33 U4_3.23 | length 218.2
  Top Layer w0.254: v1(94.615,34.29) 95.25,33.655 102.494,33.655 103.505,32.644 103.505,31.925 R2_1.2@103.585,31.845 103.296,31.556 102.803,31.556 101.854,30.607 98.298,30.607 97.536,29.845 97.536,23.179 94.931,20.574 94.361,20.574 93.123,19.336 93.123,18.51 93.599,18.034 93.98,18.034 94.757,17.257 94.757,16.973 Q2_1.2@94.93,16.8 ; P2_13.4@107.95,92.075 108.839,92.964 109.378,92.964 110.164,93.75 110.164,96.829 111.125,97.79 115.567,97.79 120.65,92.707 120.65,87.772 121.427,86.995 128.27,86.995 ; 120.881,115.936 120.914,115.936 122.44,114.41 126.365,110.485 126.365,105.065 P1_3.3@125.44,104.14 ; v1(128.905,86.995) 128.27,86.995 ; T1_1.1@140.335,69.85 R1_8.2@140.335,82.39 140.035,82.39 139.24,83.185 U1_1.33@135.11,83.185 132.08,83.185 128.27,86.995
  Top Layer w0.3: U4_3.23@119.778,115.955 120.862,115.955 120.881,115.936 ; v1(123.071,97.184) 123.19,97.303 123.19,102.235 P1_3.3@125.095,104.14 P1_3.3@125.44,104.14
  Bottom Layer w0.254: v1(94.615,34.29) 94.615,41.293 97.055,43.732 111.053,43.732 118.929,51.609 118.929,66.864 134.436,82.371 134.436,86.547 133.537,87.446 130.837,87.446 130.387,86.995 v1(128.905,86.995) 131.699,89.789 132.501,89.789 133.096,90.384 133.096,91.226 132.501,91.821 128.434,91.821 v1(123.071,97.184)
SonarEcho: Q1_2.2 R1_3.1 U1_1.11 | length 106.7
  Top Layer w0.254: U1_1.11@118.11,76.835 119.485,76.835 119.634,76.686 119.634,71.477 120.739,70.372 120.763,70.372 121.539,69.596 121.539,62.738 122.866,61.411 125.437,61.411 127.299,59.548 v1(128.457,59.548) ; v1(123.698,46.863) 123.374,46.539 123.374,27.753 125.092,26.035 138.303,26.035 140.786,23.552 140.786,15.207 141.388,14.605 145.901,14.605 146.05,14.456 146.05,11.685 145.08,10.715 R1_3.1@144.78,10.715 144.48,10.715 143.003,12.192 140.532,12.192 139.389,13.335 136.28,13.335 135.575,12.63 Q1_2.2@135.575,12.505
  Bottom Layer w0.254: v1(123.698,46.863) 127,50.165 127,58.092 v1(128.457,59.548)
SonarServoZ: P2_1.2 U2_1.6 | length 43.7
  Top Layer w0.254: U2_1.6@97.392,16.215 98.792,16.215 99.183,16.606 100.151,16.606 100.438,16.893 v1(101.45,16.893)
  Bottom Layer w0.254: v1(101.45,16.893) 101.321,16.764 99.341,16.764 97.155,14.578 97.155,9.525 99.06,7.62 101.078,7.62 101.179,7.518 102.021,7.518 102.122,7.62 112.514,7.62 113.149,8.255 P2_1.2@125.095,8.255
SonarTrig: Q1_1.2 R1_2.2 U1_1.10 | length 121.3
  Top Layer w0.254: U1_1.10@118.11,78.105 117.787,77.782 116.771,77.782 116.459,77.47 116.459,71.904 116.608,71.755 118.674,71.755 120.726,69.703 120.726,63.012 122.778,60.96 125.349,60.96 128.204,58.105 128.204,57.851 v1(128.27,57.785) ; v1(124.714,46.736) 123.825,45.847 123.825,27.94 125.349,26.416 138.559,26.416 141.237,23.738 141.237,15.393 141.644,14.986 146.059,14.986 146.501,14.544 146.501,10.357 145.669,9.525 143.73,9.525 142.54,10.715 141.94,10.715 141.517,10.292 141.517,10.072 140.843,9.398 140.843,7.366 141.224,6.985 143.002,6.985 143.51,6.477 143.51,4.848 143.361,4.699 138.303,4.699 135.875,7.127 135.748,7.127 135.575,7.3 Q1_1.2@135.575,7.425
  Bottom Layer w0.254: v1(124.714,46.736) 127.636,49.658 127.636,57.151 v1(128.27,57.785)
SpareServo1: P2_4.2 U2_1.9 | length 54
  Top Layer w0.254: U2_1.9@97.392,14.265 98.511,14.265 98.71,14.066 99.738,14.066 100.065,13.739 101.41,13.739 v1(101.513,13.842)
  Bottom Layer w0.254: v1(101.513,13.842) 103.048,13.842 105.841,11.049 107.569,11.049 107.95,11.43 115.578,11.43 119.247,15.099 119.247,16.803 119.748,17.305 119.748,23.868 120.912,25.032 132.831,25.032 135.371,22.492 135.371,22.109 P2_4.2@137.16,20.32
SpareServo2: P2_5.2 U2_1.10 | length 50.7
  Top Layer w0.254: U2_1.10@97.392,13.615 99.415,13.615 100.307,12.723 v1(100.478,12.723)
  Bottom Layer w0.254: v1(100.478,12.723) 102.336,12.723 104.461,10.598 115.383,10.598 119.697,14.912 119.697,16.616 120.199,17.118 120.199,23.682 121.098,24.581 130.994,24.581 132.182,23.393 132.182,22.376 133.097,21.46 133.097,20.573 P2_5.2@133.35,20.32
SpareServo3: P2_6.2 U2_1.11 | length 46.2
  Top Layer w0.254: U2_1.11@97.392,12.965 98.799,12.965 100.69,11.073 101.397,11.073 101.453,11.017 v1(101.646,11.017)
  Bottom Layer w0.254: v1(101.646,11.017) 99.75,11.017 98.679,9.946 98.679,9.104 99.274,8.509 100.138,8.509 101.179,9.55 103.596,9.55 103.901,9.246 115.943,9.246 121.938,15.24 125.304,15.24 127.278,17.214 127.278,18.269 129.329,20.32 P2_6.2@129.54,20.32
SpareServo4: P2_7.2 U2_1.12 | length 47.5
  Top Layer w0.254: U2_1.12@97.392,12.315 97.49,12.217 98.909,12.217 100.437,10.689 100.437,10.596 101.454,9.58 101.454,8.681 v1(101.6,8.534)
  Bottom Layer w0.254: v1(101.6,8.534) 101.771,8.706 119.407,8.706 127.734,17.032 127.734,18.087 128.605,18.959 129.831,18.959 130.708,19.836 130.708,20.804 130.024,21.488 126.898,21.488 P2_7.2@125.731,20.321
SpareServo5: P2_8.2 U2_1.13 | length 36.9
  Top Layer w0.254: U2_1.13@97.392,11.665 98.823,11.665 99.695,10.793 v1(99.695,9.525)
  Bottom Layer w0.254: v1(99.695,9.525) 99.889,9.719 100.71,9.719 100.992,10.001 103.783,10.001 104.088,9.696 115.757,9.696 121.101,15.041 121.101,15.053 121.738,15.691 122.582,15.691 124.562,17.67 124.562,18.887 123.129,20.32 P2_8.2@121.92,20.32
SpareServo6: P2_9.2 U2_1.15 | length 22
  Top Layer w0.254: U2_1.15@103.268,11.015 105.283,11.015 106.333,12.065 v1(106.68,12.065)
  Bottom Layer w0.254: v1(106.68,12.065) 115.575,12.065 116.586,13.076 116.586,18.796 P2_9.2@118.11,20.32
SpareServo7: P2_10.2 U2_1.16 | length 22.4
  Top Layer w0.254: U2_1.16@103.268,11.665 104.387,11.665 106.68,13.958 v1(106.68,14.605)
  Bottom Layer w0.254: v1(106.68,14.605) 112.788,14.605 114.038,13.355 115.59,13.355 116.205,13.97 116.205,18.415 P2_10.2@114.3,20.32
SpareServo8: P2_11.2 U2_1.17 | length 13.4
  Top Layer w0.254: U2_1.17@103.268,12.315 103.366,12.413 104.038,12.413 105.226,13.601 105.226,18.439 105.938,19.152 109.322,19.152 P2_11.2@110.49,20.32
SpareServo9: P2_12.2 U2_1.18 | length 9.3
  Top Layer w0.254: U2_1.18@103.268,12.965 103.366,13.063 104.038,13.063 104.775,13.8 104.775,18.626 106.469,20.32 P2_12.2@106.68,20.32
SpiCeNrf: P1_2.3 T1_6.1 U1_1.26 | length 28.4
  Top Layer w0.254: U1_1.26@135.11,74.295 135.66,74.295 137.795,72.16 137.795,66.867 138.208,66.455 138.208,63.722 T1_6.1@138.43,63.5
  Bottom Layer w0.254: T1_6.1@138.43,63.5 149.86,63.5 P1_2.3@153.035,60.325
SpiCsnNrf: P1_2.4 U1_1.29 | length 33.6
  Top Layer w0.254: U1_1.29@135.11,78.105 135.66,78.105 138.176,75.589 138.176,67.025 138.589,66.612 138.589,66.516 146.05,59.055 146.05,57.404 147.193,56.261 151.511,56.261 P1_2.4@153.035,57.785
SpiMiso: P1_2.7 T1_5.1 U1_1.22 | length 25.9
  Top Layer w0.254: U1_1.22@129.785,72.025 129.785,67.065 T1_5.1@133.35,63.5
  Bottom Layer w0.254: T1_5.1@133.35,63.5 136.525,60.325 P1_2.7@147.955,60.325
SpiMosi: P1_2.6 T1_4.1 U1_1.21 | length 34.3
  Top Layer w0.254: T1_4.1@128.27,63.5 128.515,63.745 U1_1.21@128.515,72.025
  Bottom Layer w0.254: T1_4.1@128.27,63.5 135.255,56.515 149.225,56.515 P1_2.6@150.495,57.785
SpiSck: P1_2.5 T1_3.1 U1_1.20 | length 40.4
  Top Layer w0.254: T1_3.1@123.19,63.5 127.245,67.555 U1_1.20@127.245,72.025
  Bottom Layer w0.254: T1_3.1@123.19,63.5 125.095,65.405 133.985,65.405 137.795,61.595 149.225,61.595 P1_2.5@150.495,60.325
TxFt232Uart: U1_1.34 U1_2.1 | length 101.2
  Top Layer w0.254: U1_2.1@74.605,25.815 78.245,25.815 78.465,26.035 v1(78.74,26.035) ; v1(132.715,84.455) U1_1.34@135.11,84.455
  Bottom Layer w0.254: v1(78.74,26.035) 86.995,26.035 88.265,27.305 88.265,37.462 95.437,44.634 107.759,44.634 110.679,44.634 118.027,51.982 118.027,67.238 132.715,81.925 v1(132.715,84.455)
UsbProgDm: R1_10.1 U1_2.16 | length 11.1
  Top Layer w0.254: v1(81.28,15.875) 80.264,16.891 80.264,17.892 80.374,18.002 81.592,18.002 U1_2.16@81.605,18.015 ; R1_10.1@81.36,10.795 82.383,10.795 82.979,11.391 v1(82.979,11.626)
  Bottom Layer w0.254: v1(81.28,15.875) 83.185,13.97 83.185,11.775 83.128,11.775 v1(82.979,11.626)
UsbProgDp: R1_11.1 U1_2.15 | length 5.1
  Top Layer w0.254: R1_11.1@81.36,13.335 81.783,13.758 81.783,14.941 82.296,15.454 82.296,17.267 82.198,17.365 U1_2.15@81.605,17.365
VLeftMotor: P4_1.1 U4_1.5 U4_1.10 | length 26.4
  Top Layer w0.508: v1(68.707,119.244) 68.88,119.071 68.88,113.637 68.86,113.617 U4_1.10@68.86,112.793 ; U4_1.5@72.11,112.793 72.104,112.799 72.125,112.821 72.067,112.878 v1(72.067,119.27) 72.067,120.327 73.025,121.285 P4_1.1@73.025,128.905
  Bottom Layer w0.508: v1(68.707,119.244) 72.042,119.244 v1(72.067,119.27)
VRightMotor: P4_2.1 U4_2.5 U4_2.10 | length 26.3
  Top Layer w0.508: v1(93.421,118.999) 93.421,118.897 93.645,118.674 93.645,113.713 93.625,113.693 U4_2.10@93.625,112.793 ; U4_2.5@96.875,112.793 96.875,113.516 96.844,113.546 96.844,120.339 97.79,121.285 P4_2.1@97.79,128.905
  Bottom Layer w0.508: v1(93.421,118.999) v1(96.901,118.999)
pads on no net: M3_1.1 M3_2.1 M3_3.1 M3_4.1 M3_5.1 P1_1.4 P2_13.6 R3_25.2 R3_26.2 R3_27.2 R4_3.1 U1_1.5 U1_1.6 U1_1.7 U1_1.12 U1_1.13 U1_1.14 U1_1.16 U1_1.17 U1_1.18 U1_1.19 U1_1.23 U1_1.27 U1_1.28 U1_1.31 U1_1.32 U1_1.37 U1_2.2 U1_2.3 U1_2.6 U1_2.8 U1_2.9 U1_2.10 U1_2.11 U1_2.12 U1_2.13 U1_2.14 U1_2.19 U1_2.24 U1_2.27 U1_2.28 U2_1.19 U2_1.20 U2_1.21 U2_1.22 U3_1.3 U3_1.20 U3_1.21 U3_1.22 U3_1.23 U3_1.24 U4_1.18 U4_1.19 U4_1.22 U4_2.15 U4_2.18 U4_2.19 U4_2.22 U4_3.1

## Polygon pours and split planes (outlines as drawn)
GND on Bottom Layer "Bottom Layer-GND" (solid, remove dead copper, pour order 18): 45.72,15.24 59.69,15.24 59.69,2.54 147.32,2.54 147.32,15.24 140.97,15.24 140.97,26.035 123.825,26.035 123.825,47.625 140.97,47.625 140.97,54.61 157.48,54.61 157.48,62.23 143.51,76.2 143.51,125.73 59.69,125.73 59.69,76.2 45.72,62.23
GND on Top Layer "Top Layer-GND" (solid, remove dead copper, pour order 17): 94.615,125.73 97.79,125.73 143.51,125.73 143.51,76.2 157.48,62.23 157.48,54.61 140.97,54.61 140.97,47.625 123.825,47.625 123.825,26.035 140.97,26.035 140.97,15.24 147.32,15.24 147.32,2.54 59.69,2.54 59.69,15.24 45.72,15.24 45.72,62.23 59.69,76.2 59.69,125.73 69.85,125.73 73.025,125.73

## Other copper
Top Layer:
  pour cut-out: 113.792,105.41 120.65,105.41 120.65,107.95 113.792,107.95

## Silkscreen, mask and mechanical layers (free items; w line width, h text height)
Top Overlay:
  drawing of 66 lines, arcs and shapes, not listed
  text "BDC_ON" at 109.855,122.555 h0.76
  text "Gnd" at 127.483,108.229 h0.76 r90
  text "-" at 121.894,106.324 h0.76 r90
  text "Scl" at 127.483,105.689 h0.76 r90
  text "IMU" at 96.545,104.165 h0.76
  text "S" at 122.022,103.784 h0.76 r90
  text "BkEn" at 69.367,103.022 h0.76
  text "Sda" at 127.483,102.895 h0.76 r90
  text "VBat" at 60.262,102.855 h0.76
  text "+" at 121.895,101.244 h0.76 r90
  text "CamY" at 113.386,100.482 h0.76 r90
  text "CamZ" at 117.704,100.482 h0.76 r90
  text "Cam" at 123.165,100.355 h0.76 r90
  text "Vcc" at 127.483,100.355 h0.76 r90
  text "3v3" at 110.642,98.577 h0.76
  text "GndS" at 138.582,98.577 h0.76
  text "Rst" at 127.483,97.815 h0.76 r90
  text "~4v" at 72.542,95.402 h0.76
  text "3v3" at 80.162,95.402 h0.76
  text "Sda" at 139.217,72.542 h0.76
  text "Scl" at 144.297,72.542 h0.76
  text "I_MOT / 1A-3.5A" at 90.17,71.755 h0.76
  text "GndP" at 72.542,70.637 h0.76
  text "Sck" at 122.072,66.192 h0.76
  text "Mosi" at 127.152,66.192 h0.76
  text "Miso" at 132.232,66.192 h0.76
  text "CeNrf" at 136.677,66.192 h0.76
  text "~4vUsb" at 112.547,57.937 h0.76
  text "5v-1" at 87.782,55.397 h0.76
  text "5v_1" at 86.512,46.634 h0.76
  text "5v_2" at 94.132,46.634 h0.76
  text "3v3" at 78.892,46.507 h0.76
  text "Rst" at 118.262,46.507 h0.76
  text "Bt" at 132.867,46.507 h0.76
  text "GndS" at 111.912,45.237 h0.76
  text "5v-2" at 99.212,42.062 h0.76
  text "5vUsb" at 92.227,25.552 h0.76
  text "9" at 106.324,24.79 h0.76
  text "8" at 110.134,24.79 h0.76
  text "7" at 113.944,24.79 h0.76
  text "6" at 117.754,24.79 h0.76
  text "5" at 121.564,24.79 h0.76
  text "4" at 125.374,24.79 h0.76
  text "3" at 129.184,24.79 h0.76
  text "2" at 132.994,24.79 h0.76
  text "1" at 136.804,24.79 h0.76
  text "-" at 139.674,22.504 h0.76 r90
  text "S" at 139.802,19.964 h0.76 r90
  text "+" at 139.675,17.424 h0.76 r90
  text "Spare Servos" at 105.004,16.662 h0.76 r90
  text "Rx" at 86.893,15.011 h0.76
  text "Tx" at 89.433,15.011 h0.76
  text "Gnd" at 133.198,12.344 h0.76 r90
  text "-" at 127.482,10.312 h0.76 r90
  text "Ech" at 133.198,9.804 h0.76 r90
  text "S" at 127.61,7.772 h0.76 r90
  text "Trg" at 133.071,7.01 h0.76 r90
  text "+" at 127.483,5.486 h0.76 r90
  text "Sonar" at 128.88,4.724 h0.76 r90
  text "ServoSonarZ" at 123.038,4.597 h0.76 r90
  text "Vcc" at 133.198,4.47 h0.76 r90
  text "Tank Alpha / Rev. C / Designer: John-William Lebel" at 76.708,2.54 h0.76
Mechanical 2:
  lines w0.254: 44.45,3.81 44.45,2.54 45.72,1.27 157.48,1.27 158.75,2.54 158.75,62.23 144.78,76.2 144.78,137.16 143.51,138.43 59.69,138.43 58.42,137.16 58.42,76.2 44.45,62.23 44.45,3.81 ; 44.45,3.81 44.45,3.81

## Text inside footprints (layer, text, board x,y; h text height)
C2_3: Top Overlay "+" at 121.666,7.747 h1.52 r180
C2_4: Top Overlay "+" at 139.446,116.332 h1.52 r180
C4_9: Top Overlay "+" at 82.677,112.731 h1.52 r270
C4_12: Top Overlay "+" at 107.442,112.731 h1.52 r270